# Altium PCB PCB.PcbDoc
Units mm, origin at the board's own origin, x right, y up, seen from the top; angles counter-clockwise.
Board outline 45 x 35 mm, 2 copper layers (Top Layer, Bottom Layer); 39 components, 24 nets, 138 pads, 29 vias.
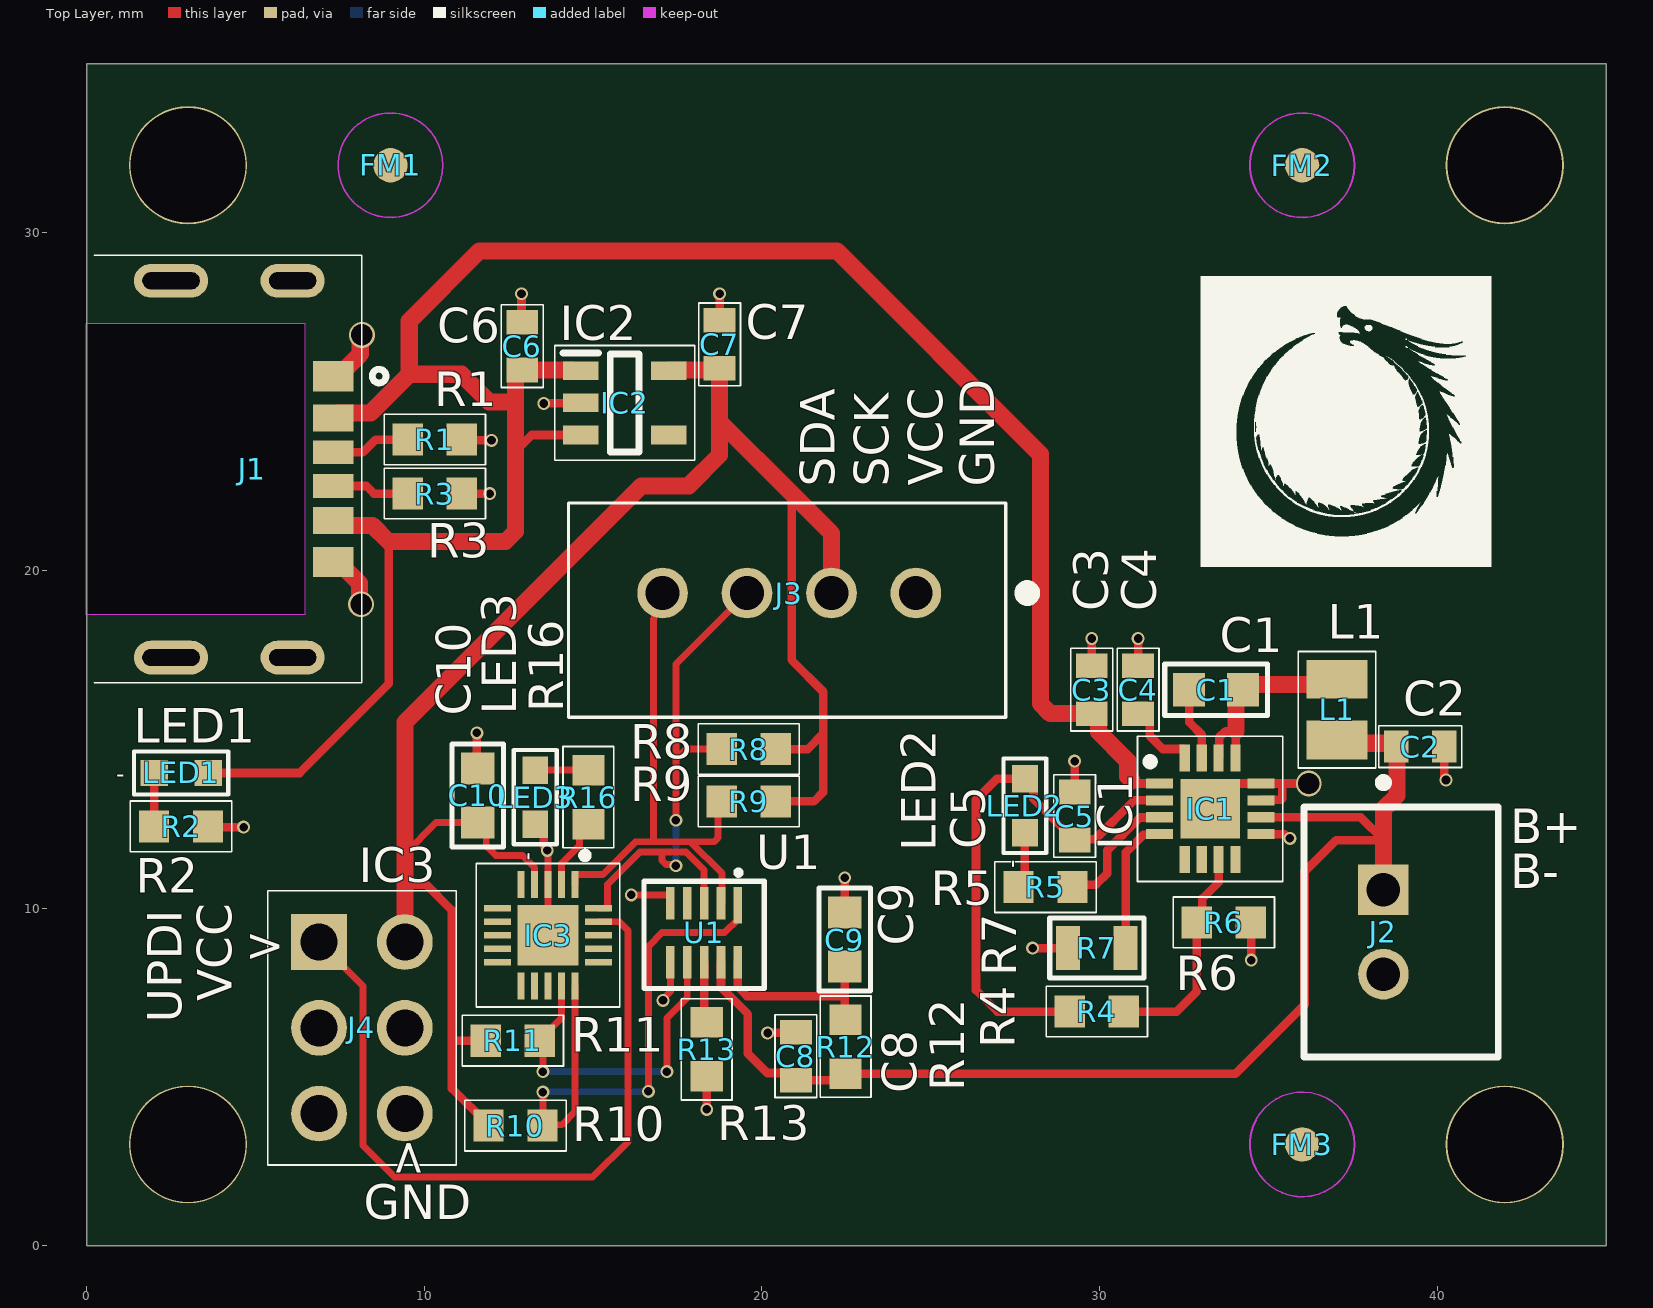
[diagram p0: Top Layer view]
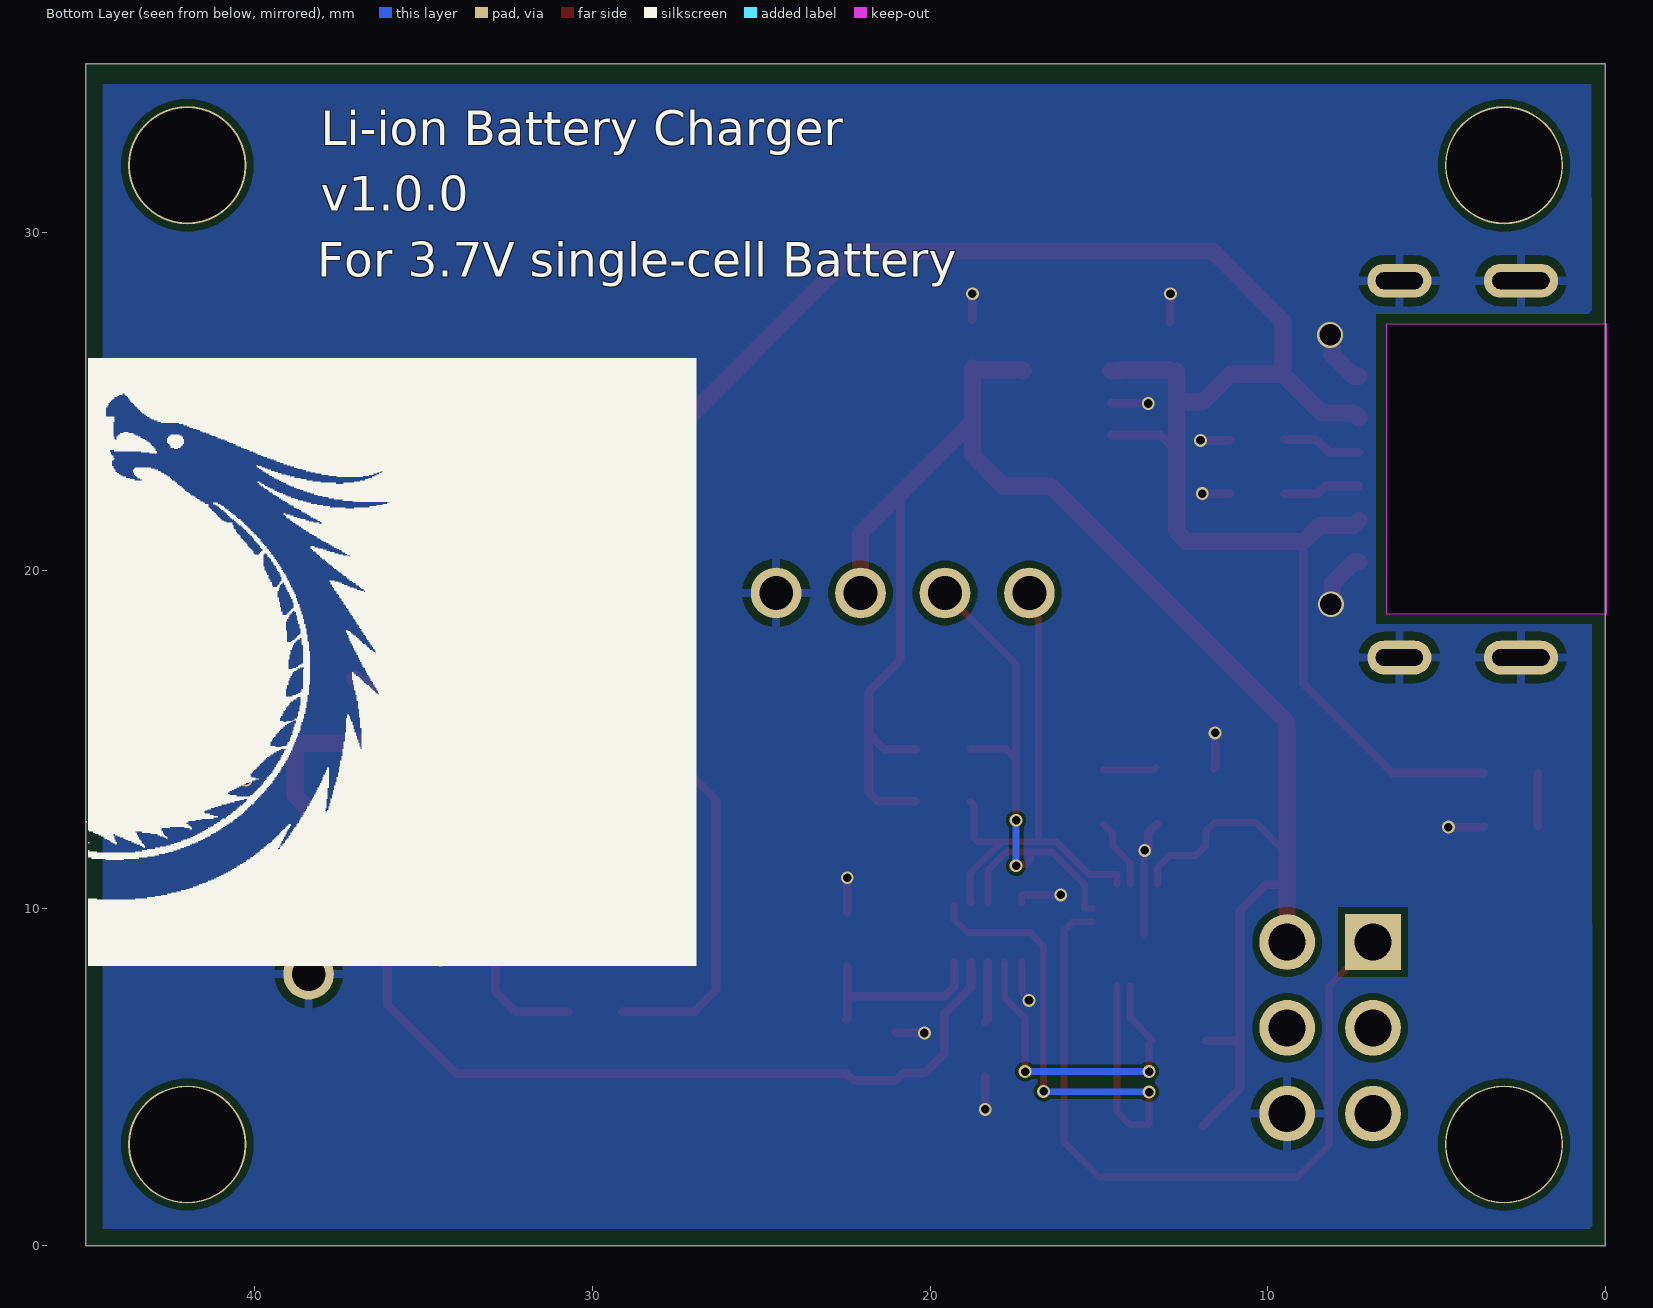
[diagram p1: Bottom Layer view, seen from below]
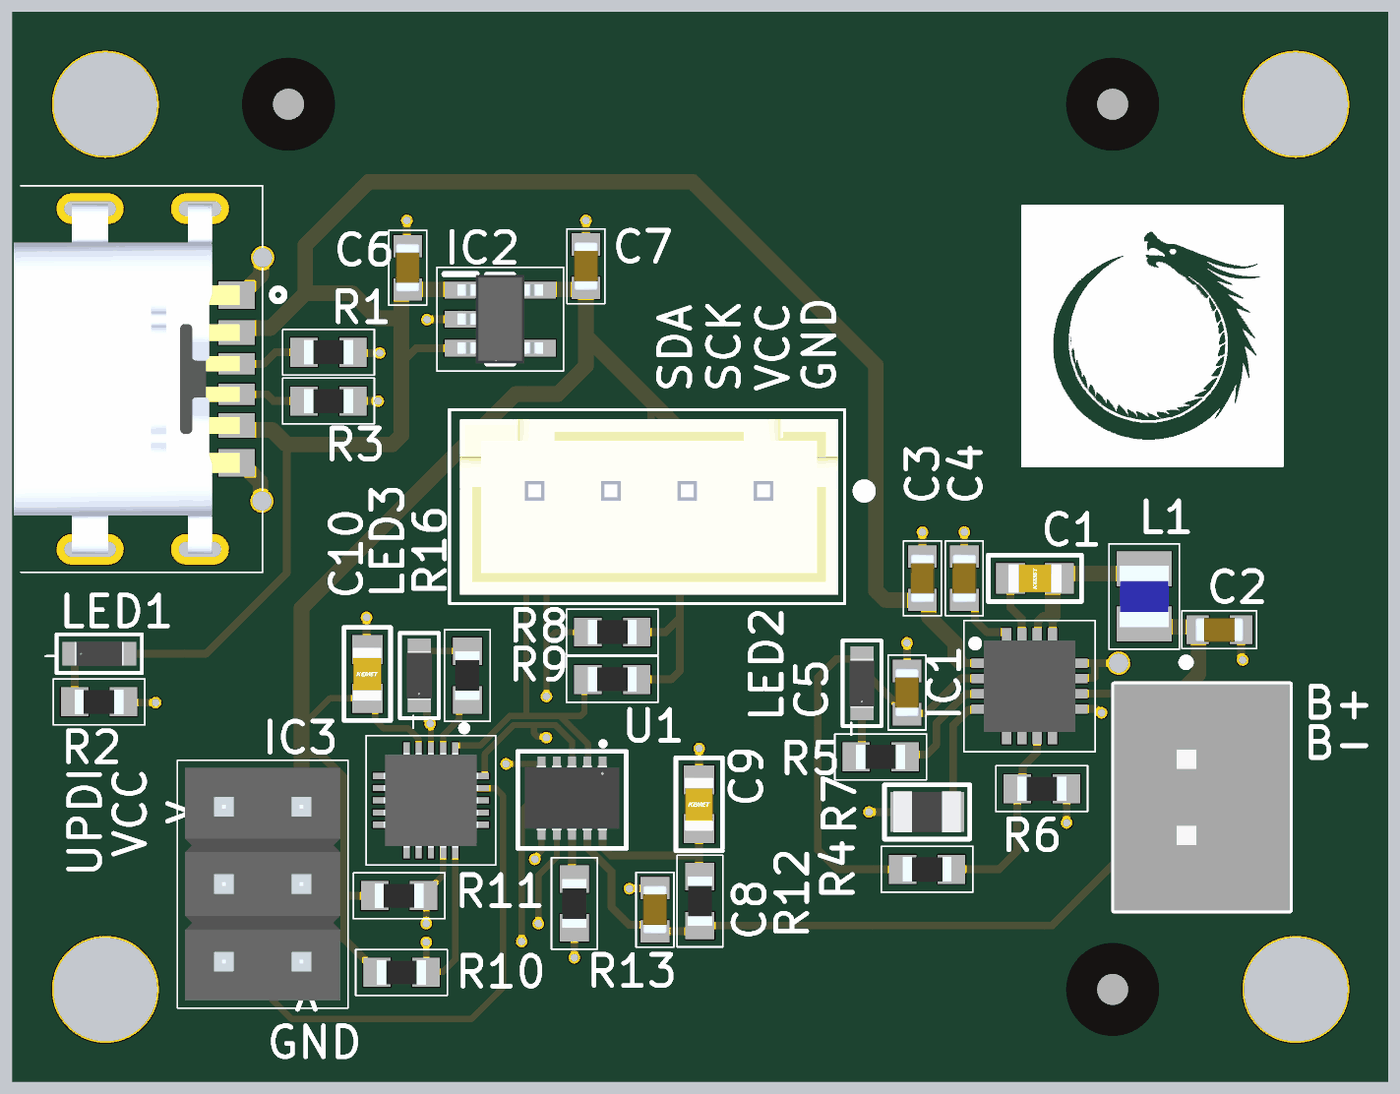
[diagram p2: 3D render of the assembled board from above, using the file's embedded part models]

## Layer stack, top to bottom
Top Solder: solder mask 0.0102, Solder Resist, Dk 3.5
Top Layer: signal copper 0.0356
Dielectric 1: dielectric 0.32, FR-4, Dk 4.8
Bottom Layer: signal copper 0.0356
Bottom Solder: solder mask 0.0102, Solder Resist, Dk 3.5

## Board outline
0,0 0,35 45,35 45,0

## Design rules (kind name [scope] priority, off if disabled: settings)
Clearance [All] p1: gap=0.1 ignorepadtopadclearanceinfootprint=FALSE except(0: SMDPad-Hole Via-Hole Fill-Hole Poly-Hole Region-Hole Text-Hole; 0.15: Arc-Text Track-Text SMDPad-SMDPad SMDPad-Text THPad-Text Via-Text Fill-Text Poly-Text Region-Text Text-Text; 0.2: Arc-Hole Track-Hole THPad-Poly Via-Via; 0.45: THPad-THPad THPad-Hole)
FabricationTestpoint [All] p1: side=3 testpointundercomponent=TRUE minsize=1.016 maxsize=2.54 preferedsize=1.524 minholesize=0 maxholesize=1.016 preferedholesize=0.813 testpointgrid=0.025 allowsidetop=TRUE allowsidebottom=TRUE usegrid=TRUE gridtolerance=0 boardedgeclearance=0.2
HoleSize [All] p1: absolutevalues=TRUE maxlimit=6.3 minlimit=0.15 maxpercent=80.000 minpercent=20.000
HoleToHoleClearance [All] p1: gap=0.2 allowstackedmicrovias=TRUE
MinimumSolderMaskSliver [All] p1: minsoldermaskwidth=0.05
PolygonConnect [All] p1: connectstyle=Relief reliefconductorwidth=0.254 reliefentries=4 polygonreliefangle="90 Angle" airgapwidth=0.254
RoutingVias [All] p1: holewidth=0.711 width=1.27 viastyle="Through Hole" minholewidth=0.15 minwidth=0.25 maxholewidth=0.711 maxwidth=1.27
SilkToSilkClearance [All] p1: silktosilkclearance=0
SilkToSolderMaskClearance [IsPad] p1: minsilkscreentomaskgap=0 clearancetoexposedcopper=TRUE
SolderMaskExpansion [All] p1: expansion=0.038 istentingtop=FALSE
Width [All] p1: maxlimit=0.762 minlimit=0.1 preferedwidth=0.254
24 further rules are at their usual default settings.

## Classes and differential pairs
component class Main_sch: FM2
component class SS7: J3
component class SS6: C8 C9 R8 R9 R10 R11 R12 R13 U1
component class SS5: C10 IC3 J4 LED3 R16
component class SS4: C6 C7 IC2
component class SS3: J2
component class SS2: C1 C2 C3 C4 C5 IC1 L1 LED2 R4 R5 R6 R7
component class SS1: J1 LED1 R1 R2 R3

## Components (designator, comment, footprint, x,y, rotation, side; value= is the part's Value field where it differs from the comment)
C1 "47nF" C0603 33.452,16.469 r0 top
C2 "10uF" CAPC1608X90N 39.497,14.783 r180 top
C3 "2.2uF" CAPC1608X90N 29.769,16.469 r270 top
C4 "10uF" CAPC1608X90N 31.14,16.469 r270 top
C5 "2.2uF" CAPC1608X90N 29.261,12.725 r270 top
C6 "1uF" CAPC1608X90N 12.903,26.645 r270 top
C7 "1uF" CAPC1608X90N 18.745,26.695 r270 top
C8 "1uF" CAPC1608X90N 21.006,5.613 r90 top
C9 "220nF" C0603 22.454,9.068 r270 top
C10 "0.1uF" C0603 11.582,13.335 r270 top
FM1 "FIDUCIAL" FIDUCIAL 9,32 r0 top
FM2 "FIDUCIAL" FIDUCIAL 36,32 r0 top
FM3 "FIDUCIAL" FIDUCIAL 36,3 r0 top
IC1 "BQ25302RTER" QFN50P300X300X80-17N-D 33.274,12.938 r0 top
IC2 "NCP718BSN500T1G" SOT95P280X100-5N 15.935,24.961 r0 top
IC3 "ATTINY1616-MNR" QFN40P300X300X90-21N 13.665,9.195 r270 top
J1 "USB_Type_C" AMPHENOL_10174819-00011LF 2.5,23 r270 top locked
J2 "JST_XH_2_PIN" B2BXHAGU 38.405,10.541 r270 top
J3 "JST_XH_4_PIN" B4BXHALFSN 24.558,19.329 r180 top
J4 "2*3 PIN" HDRV6W64P254_2X3_762X508X868P 6.883,8.992 r270 top
L1 "1uH" INDC2016X100N 37.033,15.875 r270 top
LED1 "LED GREEN DIFFUSED 0603 SMD" LED_B1931NG_HVK 2.8,14 r0 top
LED2 "LED GREEN DIFFUSED 0603 SMD" LED_B1931NG_HVK 27.788,13.03 r90 top
LED3 "LED GREEN DIFFUSED 0603 SMD" LED_B1931NG_HVK 13.284,13.284 r90 top
R1 "5.1k" RESC1608X55N 10.312,23.876 r0 top
R2 "100" RESC1608X55N 2.794,12.421 r180 top
R3 "5.1k" RESC1608X55N 10.312,22.276 r0 top
R4 "10k" RESC1608X55N 29.921,6.934 r180 top
R5 "100" RESC1608X55N 28.397,10.617 r0 top
R6 "10k" RESC1608X55N 33.68,9.576 r180 top
R7 "40.2k" STA_RMCF0805_STP-L 29.921,8.814 r0 top
R8 "4.7k" RESC1608X55N 19.609,14.707 r0 top
R9 "4.7k" RESC1608X55N 19.609,13.157 r0 top
R10 "4.7k" RESC1608X55N 12.7,3.556 r180 top
R11 "4.7k" RESC1608X55N 12.624,6.071 r180 top
R12 "1k" RESC1608X55N 22.479,5.893 r270 top
R13 "1k" RESC1608X55N 18.364,5.817 r270 top
R16 "100" RESC1608X55N 14.859,13.284 r90 top
U1 "STC3115AIQT" DFN10_2X3_STM 18.288,9.271 r270 top

## Footprints (in the part's own frame and the unit in brackets; to place one, negate y for a bottom-side part, rotate by r counter-clockwise, add the part's x,y. Pads: shape width x height; smd on the part's side, far side on the other; paste and mask are expansions set on the pad)
AMPHENOL_10174819-00011LF [mm]
  rect 0.7x1.2 smd: A5(-0.5,4.8) B5(0.5,4.8)
  rect 0.8x1.2 smd: A9(1.52,4.8) B9(-1.52,4.8)
  rect 0.9x1.2 smd: A12(2.75,4.8) B12(-2.75,4.8)
  oval 1x2.2 hole 0.5 slot 1.7 at 90 deg: SH1(-5.58,0) SH2(5.58,0)
  oval 1x1.9 hole 0.5 slot 1.4 at 90 deg: SH3(-5.58,3.6) SH4(5.58,3.6)
  Keep-Out Layer board cut-out: 4.3,3.977 -4.3,3.977 -4.3,-2.521 4.3,-2.521
  silkscreen extent -6.33,-2.27 6.33,6.36, body extent -5.73,-2.5 5.73,4.9, height 2.39
B2BXHAGU [mm]
  rect 1.5x1.5 hole 1: 1(0,0)
  round 1.5 hole 1: 2(2.5,0)
  silkscreen extent -3.3,-2.35 4.95,3.4, body extent -2.45,-2.35 4.95,3.39, height 7.55
B4BXHALFSN [mm]
  round 1.5 hole 1: 1(0,0) 2(2.5,0) 3(5,0) 4(7.5,0)
  silkscreen extent -3.43,-2.67 10.29,3.68, body extent -2.45,-2.35 9.95,3.4, height 7.52
C0603 [mm]
  rect 0.95x1 smd: 1(-0.8,0) 2(0.8,0)
  silkscreen extent -1.52,-0.76 1.52,0.76, body extent -0.87,-0.48 0.88,0.47, height 0.87
CAPC1608X90N [mm]
  rect 0.73x0.94 smd: 1(-0.71,0) 2(0.71,0)
  silkscreen extent -1.22,-0.62 1.22,0.62, body extent -0.8,-0.4 0.8,0.4, height 0.9
DFN10_2X3_STM [mil]
  rect 43x10 smd paste+0 mask+0: 1(-32,39.37)
  rect 38x10 smd paste+0 mask+0: 2(-34.5,19.68) 3(-34.5,0) 4(-34.5,-19.68) 5(-34.5,-39.37) 6(34.5,-39.37) 7(34.5,-19.68) 8(34.5,0) 9(34.5,19.68) 10(34.5,39.37)
  silkscreen extent -73,-70 65,70, body extent -41,-61 41,61, height 22
FIDUCIAL [mil]
  round 40 smd mask+40: 1(0,0)
  Top Layer keep-out circle w2: c0,0 r61
  body extent -20,-20 20,20, height 3
HDRV6W64P254_2X3_762X508X868P [mm]
  rect 1.65x1.65 hole 1.1: 1(0,0)
  round 1.65 hole 1.1: 2(0,2.54) 3(2.54,0) 4(2.54,2.54) 5(5.08,0) 6(5.08,2.54)
  silkscreen extent -1.52,-1.52 6.6,4.06, body extent -1.27,-1.27 6.35,3.81, height 8.68
INDC2016X100N [mm]
  rect 1.15x1.8 smd: 1(-0.9,0) 2(0.9,0)
  silkscreen extent -1.73,-1.15 1.72,1.15, body extent -1,-0.8 1,0.8, height 1
LED_B1931NG_HVK [mil]
  rect 32x30 smd paste+0 mask+0: 1(-31.5,0) 2(31.5,0)
  silkscreen extent -55,-25 55,25, body extent -31,-16 31,16, height 16
QFN40P300X300X90-21N [mm]
  rect 0.8x0.2 smd paste+0 mask+0.051: 1(-1.5,0.8) 2(-1.5,0.4) 3(-1.5,0) 4(-1.5,-0.4) 5(-1.5,-0.8) 11(1.5,-0.8) 12(1.5,-0.4) 13(1.5,0) 14(1.5,0.4) 15(1.5,0.8)
  rect 0.2x0.8 smd paste+0 mask+0.051: 6(-0.8,-1.5) 7(-0.4,-1.5) 8(0,-1.5) 9(0.4,-1.5) 10(0.8,-1.5) 16(0.8,1.5) 17(0.4,1.5) 18(0,1.5) 19(-0.4,1.5) 20(-0.8,1.5)
  rect 1.8x1.8 smd paste+0 mask+0.051: 21(0,0)
  silkscreen extent -2.46,-2.12 2.12,2.13, body extent -1.55,-1.55 1.55,1.55, height 0.9
QFN50P300X300X80-17N-D [mm]
  rect 0.8x0.3 smd mask+0.051: 1(-1.5,0.75) 2(-1.5,0.25) 3(-1.5,-0.25) 4(-1.5,-0.75) 9(1.5,-0.75) 10(1.5,-0.25) 11(1.5,0.25) 12(1.5,0.75)
  rect 0.3x0.8 smd mask+0.051: 5(-0.75,-1.5) 6(-0.25,-1.5) 7(0.25,-1.5) 8(0.75,-1.5) 13(0.75,1.5) 14(0.25,1.5) 15(-0.25,1.5) 16(-0.75,1.5)
  rect 1.76x1.76 smd mask+0.051: 17(0,0)
  silkscreen extent -2.15,-2.15 2.15,2.15, body extent -1.5,-1.5 1.5,1.5, height 0.8
RESC1608X55N [mm]
  rect 0.9x0.95 smd: 1(-0.8,0) 2(0.8,0)
  silkscreen extent -1.5,-0.75 1.5,0.75, body extent -0.8,-0.4 0.8,0.4, height 0.55
SOT95P280X100-5N [mm]
  rect 1.05x0.55 smd: 1(-1.3,0.95) 2(-1.3,0) 3(-1.3,-0.95) 4(1.3,-0.95) 5(1.3,0.95)
  silkscreen extent -2.07,-1.7 2.08,1.7, body extent -1.4,-1.45 1.4,1.45, height 1
STA_RMCF0805_STP-L [mil]
  rect 28x51 smd paste+0 mask+0: 1(-33.5,0) 2(33.5,0)
  silkscreen extent -55,-35 55,35, body extent -44,-26 44,26, height 26

## Part data
C1: library part C0603C473K4RECAUTO, "C0603C473K4RECAUTO", Manufacturer_Name=KEMET, Mouser Part Number=80-C0603C473K4RECAUT, Datasheet Link=https://content.kemet.com/datasheets/KEM_C1090_X7R_ESD.pdf, Height=0.87mm, Manufacturer_Part_Number=C0603C473K4RECAUTO, Mouser Price/Stock=https://www.mouser.co.uk/ProductDetail/KEMET/C0603C473K4RECAUTO?qs=MLItCLRbWsx7WtjsOHG43w%3D%3D, Supplier 1="Arrow Electronics", Supplier Part Number 1=C0603C473K4RECAUTO
C2 C4: library part CL10A106KQ8NNNC, "CL10A106KQ8NNNC", Manufacturer_Name=SAMSUNG, Mouser Part Number=187-CL10A106KQ8NNNC, Supplier Part Number 1=1276-1038-1-ND, Arrow Part Number=CL10A106KQ8NNNC, Arrow Price/Stock=https://www.arrow.com/en/products/cl10a106kq8nnnc/samsung-electro-mechanics?utm_currency=USD&region=nac, Datasheet Link=https://ms.componentsearchengine.com/Datasheets/2/CL10A106KQ8NNNC.pdf, Height=0.9mm, Manufacturer_Part_Number=CL10A106KQ8NNNC, Mouser Price/Stock=https://www.mouser.co.uk/ProductDetail/Samsung-Electro-Mechanics/CL10A106KQ8NNNC?qs=349EhDEZ59o8RdV9CD4bGw%3D%3D, Supplier 1=Digikey
C3 C5: library part CL10A225KO8NNNC, "CL10A225KO8NNNC", Manufacturer_Name=SAMSUNG, Mouser Part Number=187-CL10A225KO8NNNC, Supplier Part Number 1=1276-1040-1-ND, Arrow Part Number=CL10A225KO8NNNC, Arrow Price/Stock=https://www.arrow.com/en/products/cl10a225ko8nnnc/samsung-electro-mechanics?region=europe, Datasheet Link=https://lcsc.componentsearchengine.com/Datasheets/2/CL10A225KO8NNNC.pdf, Height=0.9mm, Manufacturer_Part_Number=CL10A225KO8NNNC, Mouser Price/Stock=https://www.mouser.co.uk/ProductDetail/Samsung-Electro-Mechanics/CL10A225KO8NNNC?qs=hqM3L16%252BxlecoJxUp5hKOw%3D%3D, Supplier 1=Digikey
C6 C7 C8: library part CL10A105KO8NNNC, "CL10A105KO8NNNC", Manufacturer_Name=SAMSUNG, Mouser Part Number=187-CL10A105KO8NNNC, Supplier Part Number 1=1276-1034-1-ND, Arrow Part Number=CL10A105KO8NNNC, Arrow Price/Stock=https://www.arrow.com/en/products/cl10a105ko8nnnc/samsung-electro-mechanics?utm_currency=USD&region=nac, Datasheet Link=https://labcenter.componentsearchengine.com/Datasheets/2/CL10A105KO8NNNC.pdf, Height=0.9mm, Manufacturer_Part_Number=CL10A105KO8NNNC, Mouser Price/Stock=https://www.mouser.co.uk/ProductDetail/Samsung-Electro-Mechanics/CL10A105KO8NNNC?qs=hqM3L16%252BxlfR4qamq4FMLg%3D%3D, Supplier 1=Digikey
C9: library part C0603C224K4RECAUTO, "Capacitor C0603C224K4RECAUTO", Manufacturer_Name=KEMET, Mouser Part Number=80-C0603C224K4RECAUT, Arrow Part Number=C0603C224K4RECAUTO, Arrow Price/Stock=https://www.arrow.com/en/products/c0603c224k4recauto/kemet-corporation?region=nac, Datasheet Link=https://content.kemet.com/datasheets/KEM_C1090_X7R_ESD.pdf, Height=0.87mm, Manufacturer_Part_Number=C0603C224K4RECAUTO, Mouser Price/Stock=https://www.mouser.co.uk/ProductDetail/KEMET/C0603C224K4RECAUTO?qs=MLItCLRbWszB36u3S8vAZQ%3D%3D, Supplier 1="Arrow Electronics", Supplier Part Number 1=C0603C224K4RECAUTO
C10: library part C0603C104K3RACTU, "Capacitor C0603C104K3RACTU", Manufacturer_Name=KEMET, Mouser Part Number=80-C0603C104K3R, Arrow Part Number=C0603C104K3RACTU, Arrow Price/Stock=https://www.arrow.com/en/products/c0603c104k3ractu/kemet-corporation?utm_currency=USD&region=nac, Datasheet Link=https://content.kemet.com/datasheets/KEM_C1002_X7R_SMD.pdf, Height=0.87mm, Manufacturer_Part_Number=C0603C104K3RACTU, Mouser Price/Stock=https://www.mouser.co.uk/ProductDetail/KEMET/C0603C104K3RACTU?qs=l5k%252BbMnNDklvfdneglCDAg%3D%3D, Supplier 1="Arrow Electronics", Supplier Part Number 1=C0603C104K3RACTU
FM1 FM2 FM3: library part FM
IC1: "Integrated Circuit", Manufacturer_Name="Texas Instruments", Mouser Part Number=595-BQ25302RTER, Arrow Part Number=BQ25302RTER, Arrow Price/Stock=null?region=nac, Datasheet Link=https://www.ti.com/lit/gpn/bq25302?HQS=ti-null-null-sf-df-pf-sep-wwe&DCM=yes, Height=0.8mm, Manufacturer_Part_Number=BQ25302RTER, Mouser Price/Stock=https://www.mouser.co.uk/ProductDetail/Texas-Instruments/BQ25302RTER?qs=T94vaHKWudT5T0v43I60Mg%3D%3D, Supplier 1=Mouser, Supplier Part Number 1=595-BQ25302RTER
IC2: "Integrated Circuit", Manufacturer_Name=onsemi, Mouser Part Number=863-NCP718BSN500T1G, Arrow Part Number=NCP718BSN500T1G, Arrow Price/Stock=https://www.arrow.com/en/products/ncp718bsn500t1g/on-semiconductor?region=nac, Datasheet Link=https://www.onsemi.com/pub/Collateral/NCP718-D.PDF, Height=1mm, Manufacturer_Part_Number=NCP718BSN500T1G, Mouser Price/Stock=https://www.mouser.co.uk/ProductDetail/onsemi/NCP718BSN500T1G?qs=MLItCLRbWsy0K4chDaw%252BGA%3D%3D, Supplier 1="Arrow Electronics", Supplier Part Number 1=NCP718BSN500T1G
IC3: "Integrated Circuit ATTINY1616-MNR", Manufacturer_Name=Microchip, Mouser Part Number=556-ATTINY1616MNR, Supplier Part Number 1=ATTINY1616-MNRCT-ND, Arrow Part Number=ATTINY1616-MNR, Arrow Price/Stock=https://www.arrow.com/en/products/attiny1616-mnr/microchip-technology?utm_currency=USD&region=nac, Datasheet Link=https://datasheet.datasheetarchive.com/originals/distributors/DKDS41/DSANUWW0026757.pdf, Height=0.9mm, Manufacturer_Part_Number=ATTINY1616-MNR, Mouser Price/Stock=https://www.mouser.co.uk/ProductDetail/Microchip-Technology/ATTINY1616-MNR?qs=HXFqYaX1Q2yKNpuKQU9qww%3D%3D, Supplier 1=Digikey
J1: library part 10174819-00011LF, "USB-C (USB TYPE-C) Receptacle Connector 24 (6+18 Dummy) Position Surface Mount, Right Angle", Package=None, Supplier Part Number 1=609-10174819-00011LFCT-ND, Check_prices=https://www.snapeda.com/parts/10174819-00011LF/Amphenol/view-part/?ref=eda, MF="Amphenol Communications Solutions-FCI", MP=10174819-00011LF, SnapEDA_Link=https://www.snapeda.com/parts/10174819-00011LF/Amphenol/view-part/?ref=snap, Supplier 1=Digikey
J2: library part B2B-XH-A-GU, "Connector", Manufacturer_Name="JST (JAPAN SOLDERLESS TERMINALS)", Mouser Part Number=N/A, Arrow Part Number=B2B-XH-A-GU, Arrow Price/Stock=https://www.arrow.com/en/products/b2b-xh-a-gu/jst-manufacturing?utm_currency=USD&region=europe, Datasheet Link=http://www.jst-mfg.com/product/pdf/eng/eXH.pdf, Height=7mm, Manufacturer_Part_Number=B2B-XH-A-GU, Mouser Price/Stock=https://www.mouser.co.uk/ProductDetail/JST-Commercial/B2B-XH-A-GU?qs=IKkN%2F947nfBVsqimfO%252BieQ%3D%3D
J3: library part B4B-XH-A_LF__SN_, "Connector", Arrow Part Number=B4B-XH-A(LF)(SN), Manufacturer_Name="JST (JAPAN SOLDERLESS TERMINALS)", Mouser Part Number=306-B4BXHALFSN, Arrow Price/Stock=https://www.arrow.com/en/products/b4b-xh-a-lf-sn/jst-manufacturing?utm_currency=USD&region=europe, Datasheet Link=https://datasheet.lcsc.com/szlcsc/JST-Sales-America-B4B-XH-A-LF-SN_C144395.pdf, Height=7mm, Manufacturer_Part_Number=B4B-XH-A(LF)(SN), Mouser Price/Stock=https://www.mouser.co.uk/ProductDetail/JST-Commercial/B4B-XH-ALFSN?qs=cdbOS8ANM9CfC08d%252BywhFw%3D%3D, Supplier 1=Mouser, Supplier Part Number 1=306-B4BXHALFSN
J4: library part M20-9980346, "Connector", Manufacturer_Name=Harwin, Mouser Part Number=855-M20-9980346, Supplier Part Number 1=952-2121-ND, Datasheet Link=https://cdn.harwin.com/pdfs/M20-998.pdf, Height=8.68mm, Manufacturer_Part_Number=M20-9980346, Mouser Price/Stock=https://www.mouser.co.uk/ProductDetail/Harwin/M20-9980346?qs=%252Bk6%2F5FB6qrmHk2P20oz3FA%3D%3D, Supplier 1=Digikey
L1: library part CIGT201610LH1R0MNE, "CIGT201610LH1R0MNE", Manufacturer_Name=SAMSUNG, Mouser Part Number=187-CIGT201610LH1R0M, Supplier Part Number 1=1276-6910-1-ND, Arrow Part Number=CIGT201610LH1R0MNE, Arrow Price/Stock=https://www.arrow.com/en/products/cigt201610lh1r0mne/samsung-electro-mechanics?utm_currency=USD&region=nac, Datasheet Link=https://datasheet.datasheetarchive.com/originals/distributors/DKDS-19/372470.pdf, Height=1mm, Manufacturer_Part_Number=CIGT201610LH1R0MNE, Mouser Price/Stock=https://www.mouser.co.uk/ProductDetail/Samsung-Electro-Mechanics/CIGT201610LH1R0MNE?qs=xZ%2FP%252Ba9zWqYdDsZ4M%252BqcTg%3D%3D, Supplier 1=Digikey
LED1 LED2 LED3: library part B1931NG--20D001114U1930, Mfr_Name=Harvatek, Supplier Part Number 1=3147-B1931NG--20D001114U1930CT-ND, Supplier 1=Digikey, Type="LED Indication"
R1 R3: library part RC0603FR-075K1L, "Resistor RC0603FR-075K1L", Manufacturer_Name=KEMET, Mouser Part Number=603-RC0603FR-075K1L, Supplier Part Number 1=311-5.10KHRCT-ND, Arrow Part Number=RC0603FR-075K1L, Arrow Price/Stock=https://www.arrow.com/en/products/rc0603fr-075k1l/yageo?region=nac, Datasheet Link=http://www.yageo.com/documents/recent/PYu-RC0603_51_RoHS_L_v5.pdf, Height=0.55mm, Manufacturer_Part_Number=RC0603FR-075K1L, Mouser Price/Stock=https://www.mouser.co.uk/ProductDetail/YAGEO/RC0603FR-075K1L?qs=gt6vzsuosg2jUUwxnI2PJQ%3D%3D, Supplier 1=Digikey
R2 R5 R16: library part ERJ-3EKF1000V, "Resistor ERJ-3EKF1000V", Manufacturer_Name=Panasonic, Mouser Part Number=667-ERJ-3EKF1000V, Arrow Part Number=ERJ-3EKF1000V, Arrow Price/Stock=https://www.arrow.com/en/products/erj-3ekf1000v/panasonic?utm_currency=USD&region=nac, Datasheet Link=http://industrial.panasonic.com/cdbs/www-data/pdf/RDA0000/AOA0000C86.pdf, Height=0.55mm, Manufacturer_Part_Number=ERJ-3EKF1000V, Mouser Price/Stock=https://www.mouser.co.uk/ProductDetail/Panasonic/ERJ-3EKF1000V?qs=H7k1u0Mp9JS7i8KGO5m47A%3D%3D, Supplier 1=Mouser, Supplier Part Number 1=667-ERJ-3EKF1000V
R4 R6: library part RK73H1JTTD1002F, "RK73H1JTTD1002F", Manufacturer_Name="KOA Speer", Mouser Part Number=660-RK73H1JTTD1002F, Supplier Part Number 1=2019-RK73H1JTTD1002FCT-ND, Arrow Part Number=RK73H1JTTD1002F, Arrow Price/Stock=https://www.arrow.com/en/products/rk73h1jttd1002f/koa-speer-electronics?region=nac, Datasheet Link=http://www.koaspeer.com/catimages/Products/RK73-RT/RK73-RT.pdf, Height=0.55mm, Manufacturer_Part_Number=RK73H1JTTD1002F, Mouser Price/Stock=https://www.mouser.co.uk/ProductDetail/KOA-Speer/RK73H1JTTD1002F?qs=%252BHd4ebZ%252Bq6V15kIYdKv25A%3D%3D, Supplier 1=Digikey
R7: library part RMCF0805FT40K2, "RMCF0805FT40K2", Mfr_Name="Stackpole International", Supplier Part Number 1=RMCF0805FT40K2CT-ND, Supplier 1=Digikey
R8 R9 R10 R11: library part RC0603FR-074K7L, "Resistor RC0603FR-074K7L", Manufacturer_Name=YAGEO, Mouser Part Number=603-RC0603FR-074K7L, Supplier Part Number 1=5489695, Arrow Part Number=RC0603FR-074K7L, Arrow Price/Stock=https://www.arrow.com/en/products/rc0603fr-074k7l/yageo?utm_currency=USD&region=europe, Datasheet Link=https://componentsearchengine.com/Datasheets/2/RC0603FR-074K7L.pdf, Height=0.55mm, Manufacturer_Part_Number=RC0603FR-074K7L, Mouser Price/Stock=https://www.mouser.co.uk/ProductDetail/YAGEO/RC0603FR-074K7L?qs=gt6vzsuosg37y0l7Vt36bQ%3D%3D, Supplier 1="Future Electronics"
R12 R13: library part RMCF0603FT1K00, "RMCF0603FT1K00", Manufacturer_Name="Stackpole Electronics", Mouser Part Number=708-RMCF0603FT1K00, Supplier Part Number 1=RMCF0603FT1K00CT-ND, Arrow Part Number=RMCF0603FT1K00, Arrow Price/Stock=https://www.arrow.com/en/products/rmcf0603ft1k00/stackpole-electronics?utm_currency=USD&region=nac, Datasheet Link=https://www.seielect.com/Catalog/SEI-RMCF_RMCP.pdf, Height=0.55mm, Manufacturer_Part_Number=RMCF0603FT1K00, Mouser Price/Stock=https://www.mouser.co.uk/ProductDetail/SEI-Stackpole/RMCF0603FT1K00?qs=FESYatJ8odI%252BYiPlprc1Pg%3D%3D, Supplier 1=Digikey
U1: "STC3115AIQT Fuel Gauge IC", Mfr_Name=STMicroelectronics, RefDes=RefDes, Supplier 1="Arrow Electronics", Supplier Part Number 1=STC3115AIQT, Type=Type

## Free pads (board coordinates)
  round 3.5 hole 3.4: 1(3,3) 2(3,32) 3(42,32) 4(42,3)

## Via types
v1: diameter 0.381, hole 0.254, Top Layer to Bottom Layer, 26 vias
v2: diameter 0.762, hole 0.635, Top Layer to Bottom Layer, 3 vias

## Nets (pads, with @x,y where several pads share a name; then routed paths per layer and width w, separated by ;. In a path a pad name is that pad's centre, name@x,y a point inside that pad or via, vN(x,y) a via of type N, cw(c..) or ccw(c..) an arc to the next point about the centre after c; other vN are vias at no path point)
4.7v_SUPPLY: C7.2 C10.2 IC2.5 IC3.4 J3.2 J4.2 R8.2 R9.2 R10.2 R11.2 | length 57.2
  Top Layer w0.203: 9.423,11.608 10.351,12.535 C10.2 11.836,12.281 11.836,11.836 12.116,11.557 12.903,11.557 13.264,11.197 13.264,10.696 IC3.4
  Top Layer w0.254: 9.423,10.846 9.576,10.693 10.058,10.693 10.82,9.931 10.82,6.183 ; R11.2 10.933,6.071 10.82,6.183 ; R10.2 11.9,3.581 10.836,4.645 10.82,4.645 10.82,6.183 ; R9.2 21.539,13.157 21.819,13.437 21.819,15.164 ; R8.2 21.361,14.707 21.819,15.164 ; 20.879,22.276 20.879,17.348 21.819,16.408 21.819,15.164
  Top Layer w0.508: J4.2 9.423,10.846 9.423,11.608 9.423,15.494 16.434,22.504 17.831,22.504 18.745,23.419 18.745,24.409 ; IC2.5 17.256,25.932 18.691,25.932 C7.2 18.745,24.409 ; J3.2 22.058,21.097 20.879,22.276 18.745,24.409
+5: C3.2 C6.2 IC1.1 IC2.1 IC2.3 J1.A9 J1.B9 LED1.2 | length 67.4
  Top Layer w0.254: LED1.2 6.304,14 8.941,16.637 8.941,20.853 ; 12.7,23.529 13.181,24.011 IC2.3 ; 30.963,13.767 31.041,13.688 IC1.1
  Top Layer w0.508: J1.A9 7.446,21.334 8.46,21.334 8.941,20.853 12.402,20.853 12.7,21.151 12.7,23.529 12.7,24.985 C6.2@12.7,25.908 ; J1.B9 7.446,24.666 8.41,24.666 9.552,25.808 ; 12.684,24.985 11.921,24.985 11.099,25.808 9.552,25.808 ; C6.2 14.361,25.935 14.385,25.911 IC2.1 ; 30.963,13.767 30.836,13.894 30.836,14.351 29.972,15.215 29.972,15.648 29.861,15.759 28.542,15.759 28.245,16.056 28.245,23.444 22.225,29.464 11.633,29.464 9.552,27.382 9.552,25.808
ALM: IC3.15 R10.1 U1.1 | length 16.6
  Top Layer w0.203: v1(13.513,4.547) 13.513,3.569 13.525,3.581 14.072,3.581 14.465,3.975 IC3.15 ; v1(16.637,4.572) 16.637,8.865 17.043,9.271 18.894,9.271 19.288,9.665 U1.1
  Bottom Layer w0.203: v1(13.513,4.547) 13.525,4.559 16.624,4.559 v1(16.637,4.572)
GND: C2.1 C3.1 C4.1 C5.1 C6.1 C7.1 C8.2 C9.1 C10.1 IC1.9 IC1.11 IC1.12 IC1.17 IC2.2 IC3.3 IC3.21 J1.A12 J1.B12 J1.SH1 J1.SH2 J1.SH3 J1.SH4 J2.2 J3.1 J4.6 LED3.1 R1.2 R2.1 R3.2 R6.1 R7.1 R13.2 U1.5 U1.6 | length 29.8
  Top Layer w0.203: v1(13.64,11.709) 13.664,11.686 13.664,10.696 IC3.3 IC3.21 ; v1(16.129,10.389) 17.263,10.389 17.288,10.363 U1.5 ; v1(17.069,7.264) 17.069,7.313 17.288,7.532 U1.6
  Top Layer w0.254: R2.1 3.619,12.395 v1(4.648,12.395) ; R3.2 v1(11.938,22.276) ; R1.2 11.138,23.851 v1(11.989,23.851) ; v1(11.557,15.189) 11.557,14.16 C10.1 ; v1(12.878,28.194) 12.878,27.38 C6.1 ; LED3.1 13.538,12.23 13.538,11.845 13.64,11.744 v1(13.64,11.709) ; v1(13.538,24.943) 13.547,24.952 14.626,24.952 IC2.2 ; v1(18.364,4.039) R13.2 ; C7.1 v1(18.745,28.194) ; v1(20.168,6.299) 20.18,6.311 20.994,6.311 C8.2 ; C9.1 v1(22.454,10.897) ; v1(28.016,8.814) R7.1 ; C5.1 v1(29.261,14.351) ; C3.1 v1(29.769,17.983) ; C4.1 v1(31.14,17.983) ; IC1.17 34.024,13.688 IC1.12 IC1.12 35.413,13.689 ; R6.1 34.493,9.563 v1(34.493,8.458) ; IC1.9 35.479,12.188 35.602,12.065 v1(35.636,12.065) ; IC1.11 34.797,13.211 35.386,13.211 35.413,13.238 35.413,13.689 ; v2(36.196,13.689) 35.413,13.689 ; C2.1 40.207,13.879 40.259,13.827 v1(40.259,13.792)
  Top Layer w0.508: J1.A12 7.45,20.25 8.079,19.621 8.079,19.048 v2(8.128,18.999) ; J1.B12 7.45,25.75 8.105,26.405 8.105,26.926 v2(8.153,26.975)
ICHG: IC1.4 R7.2 | length 4.1
  Top Layer w0.254: R7.2 30.772,11.646 31.291,12.165 31.751,12.165 IC1.4
LED: IC3.2 R16.1 | length 2.1
  Top Layer w0.203: IC3.2 14.067,10.696 14.067,11.324 14.592,11.848 14.592,12.217 R16.1
NetC1_1: C1.1 IC1.15 | length 2.2
  Top Layer w0.254: C1.1 32.652,15.507 33.024,15.134 IC1.15
NetC1_2: C1.2 IC1.13 IC1.14 L1.1 | length 6.2
  Top Layer w0.254: IC1.14 33.547,14.461 33.547,15.056 33.731,15.24 34.036,15.24 34.036,14.45 IC1.13
  Top Layer w0.508: 34.036,15.24 34.036,16.253 C1.2 34.405,16.622 36.88,16.622 L1.1
NetC2_2: C2.2 C8.1 IC1.10 J2.1 L1.2 R12.2 U1.9 | length 37.6
  Top Layer w0.254: U1.9 18.788,7.653 19.583,6.858 19.583,5.686 20.155,5.115 20.795,5.115 C8.1 22.29,4.903 R12.2 34.023,5.093 36.068,7.137 36.068,11.074 37.008,12.014 38.405,12.014 37.731,12.688 IC1.10
  Top Layer w0.508: L1.2 37.129,14.879 38.691,14.879 C2.2 38.811,14.759 38.811,13.335 38.405,12.929 38.405,12.014 J2.1
NetC9_2: C9.2 R12.1 U1.10 | length 5.6
  Top Layer w0.254: U1.10 19.288,7.661 19.558,7.391 22.352,7.391 22.454,7.493 ; C9.2 22.454,7.493 ; R12.1 22.454,6.718 22.454,7.493
NetIC1_7: IC1.7 R4.1 R6.2 | length 6.6
  Top Layer w0.254: R4.1 32.283,6.934 32.88,7.531 R6.2 ; R6.2@32.88,9.601 33.047,9.767 33.047,10.283 33.524,10.76 IC1.7
NetJ1_A5: J1.A5 R1.1 | length 2.4
  Top Layer w0.254: J1.A5 7.305,23.495 8.179,23.495 8.56,23.876 R1.1
NetJ1_B5: J1.B5 R3.1 | length 2.3
  Top Layer w0.254: J1.B5 8.285,22.5 8.509,22.276 R3.1
NetLED1_1: LED1.1 R2.2 | length 1.6
  Top Layer w0.254: R2.2 2,12.427 LED1.1
NetLED2_1: LED2.1 R5.1 | length 1.7
  Top Layer w0.254: R5.1 27.788,10.808 LED2.1
NetLED3_2: LED3.2 R16.2 | length 1.6
  Top Layer w0.203: LED3.2@13.31,14.16 13.386,14.084 R16.2
NetR13_1: R13.1 U1.8 | length 1.8
  Top Layer w0.254: U1.8 18.288,6.693 R13.1
PMID: C4.2 IC1.16 | length 2.3
  Top Layer w0.254: C4.2 31.245,15.759 31.483,15.521 31.483,15.1 31.873,14.711 32.501,14.711 32.524,14.688 IC1.16
REGN: C5.2 IC1.2 LED2.2 R4.2 | length 15.9
  Top Layer w0.254: R4.2 26.975,6.934 26.34,7.569 26.34,13.208 26.962,13.83 LED2.2 28.042,13.576 28.042,13.235 28.918,12.358 28.918,12.253 29.156,12.015 C5.2 29.285,12.04 29.87,12.04 31.019,13.188 IC1.2
RSTIO: IC3.14 R11.1 U1.7 | length 10
  Top Layer w0.203: v1(13.513,5.156) 13.513,5.982 R11.1 13.424,6.096 14.065,6.737 IC3.14 ; v1(17.183,5.156) 17.183,6.747 17.788,7.352 U1.7
  Bottom Layer w0.203: v1(13.513,5.156) v1(17.183,5.156)
SCK: IC3.20 J3.3 R8.1 U1.3 | length 16.6
  Top Layer w0.203: IC3.20 15.427,9.995 15.429,9.996 15.429,10.704 16.383,11.659 17.069,11.659 ; v1(17.45,11.252) 17.416,11.286 17.162,11.286 17.043,11.405 17.043,11.633 17.069,11.659 ; v1(17.45,12.598) 17.45,14.402 ; U1.3 18.288,11.125 17.755,11.659 17.069,11.659 ; R8.1 17.755,14.707 17.45,14.402 ; J3.3 17.45,17.221 17.45,14.402
  Bottom Layer w0.203: v1(17.45,11.252) v1(17.45,12.598)
SDA: IC3.1 J3.4 R9.1 U1.2 | length 15.8
  Top Layer w0.203: IC3.1 14.465,10.992 14.467,10.993 14.609,10.993 15.286,10.994 16.254,11.962 16.789,11.962 ; J3.4 16.81,19.081 16.81,18.582 16.789,18.562 16.789,11.962 ; U1.2 18.813,10.172 18.813,11.032 17.883,11.962 ; R9.1 18.694,13.043 18.694,12.081 18.575,11.962 17.883,11.962 ; 16.789,11.962 17.883,11.962
STAT: IC1.3 R5.2 | length 3.8
  Top Layer w0.254: R5.2 29.273,10.693 29.896,10.693 30.226,11.024 30.226,11.709 31.199,12.682 31.768,12.682 IC1.3
UPDI: IC3.19 J4.1 | length 22.5
  Top Layer w0.203: J4.1 8.179,7.696 8.179,2.964 9.111,2.032 14.986,2.032 16.027,3.073 16.027,9.334 15.767,9.595 IC3.19
pads on no net: FM1.1 FM2.1 FM3.1 IC1.5 IC1.6 IC1.8 IC2.4 IC3.5 IC3.6 IC3.7 IC3.8 IC3.9 IC3.10 IC3.11 IC3.12 IC3.13 IC3.16 IC3.17 IC3.18 J4.3 J4.4 J4.5 U1.4

## Polygon pours and split planes (outlines as drawn)
GND on Bottom Layer "GND_L02_P000" (solid, remove dead copper, pour order 0): 0.39,0.5 44.5,0.5 44.5,34.4 0.414,34.4

## Other copper
Bottom Layer:
  pour cut-out: -0.021,27.3 -0.021,27.579 0,27.6 6.8,27.6 6.8,27.3
  pour cut-out: 6.5,18.4 6.8,18.4 6.8,27.5 6.5,27.5
  pour cut-out: 0.403,18.592 0.403,18.403 0.4,18.4 6.7,18.4 6.7,18.6 6.692,18.592

## Silkscreen, mask and mechanical layers (free items; w line width, h text height)
Top Overlay:
  region: 39.09,26.854 39.09,26.838 39.074,26.838 39.074,26.854
  region: 37.555,21.71 37.555,21.726 37.571,21.726 37.571,21.71
  region: 39.122,26.617 39.122,26.601 39.09,26.601 39.09,26.617 39.106,26.617
  region: 39.074,26.632 39.09,26.632 39.09,26.617 39.074,26.617
  region: 37.982,27.091 37.982,27.076 37.966,27.076 37.966,27.091 37.919,27.091 37.919,27.107 37.903,27.107 37.903,27.123 37.887,27.123 37.887,27.139 37.871,27.139 37.871,27.171 37.856,27.171 37.856,27.218 37.871,27.218 37.871,27.234 37.887,27.234 37.887,27.25 37.903,27.25 37.903,27.266 38.03,27.266 38.03,27.25 38.046,27.25 38.046,27.234 38.061,27.234 38.061,27.218 38.077,27.218 38.077,27.139 38.061,27.139 38.061,27.123 38.046,27.123 38.046,27.107 38.03,27.107 38.03,27.091 37.998,27.091
  region: 5 vertices and 11 holes, not listed, extent 32.996,20.111 41.607,28.706
  text "VCC" at 25.349,22.504 h1.02 r90
  text "SDA" at 22.149,22.479 h1.02 r90
  text "SCK" at 23.749,22.479 h1.02 r90
  text "GND" at 26.873,22.479 h1.02 r90
  text "-" at 0.876,13.722 h0.51
  text "B+" at 42.164,11.913 h1.02
  text "-" at 13.284,11.405 h0.51 r90
  text "-" at 27.635,11.176 h0.51 r90
  text "B-" at 42.164,10.592 h1.02
  text ">" at 4.699,8.407 h1.02
  text "VCC" at 4.293,7.239 h1.02 r90
  text "UPDI" at 2.819,6.604 h1.02 r90
  text ">" at 9.982,2.007 h1.02 r90
  text "GND" at 8.204,0.787 h1.02
Bottom Overlay:
  drawing of 10 lines, arcs and shapes, not listed
  text "Li-ion Battery Charger" at 38.048,32.591 h1.02
  text "v1.0.0" at 38.048,30.652 h1.02
  text "For 3.7V single-cell Battery" at 38.148,28.691 h1.02